# EAGLE board circuit (EAGLE 9.7.0)

Size 156.44 x 90.49 mm. Coordinates in mm from the lower left corner, seen from the top.
Outline: 0,0 156.44,0 156.44,90.49 0,90.49 0,0
Copper layers (1*16): Top 0.035mm / dielectric 1.5mm / Bottom 0.035mm
Design rules "default": minimum track width 6mil, minimum drill 0.35mm, track to track 6mil, track to pad 6mil, pad to pad 6mil, via to via 6mil, smd to smd 6mil, copper to edge 40mil, drill to drill 6mil, minimum pad ring 10mil, minimum via ring 8mil, stop-mask expansion 4mil, vias tented up to drill 0mil, thermal gap 10mil

## Footprints (pad centres in the part's own frame; a part is rotated, then mirrored left to right if it is on the bottom)
DIODE-AXIAL = drill 1: 1 -5.08,0; 2 5.08,0
LEDRD254W60D565H860B = drill 0.981 pad 1.581: 1 -1.27,0; 2 1.27,0
LEDRD254W60D565H860B_G = drill 0.981 pad 1.581: 1 -1.27,0; 2 1.27,0
LU-5-R = drill 0.8: 1 -6.35,-3.81; 5 3.81,-3.81; 6 6.35,-3.81; 7 6.35,3.81; 8 3.81,3.81; 12 -6.35,3.81
MOTOR = drill 1.118 pad 3.15 octagon: + 2.54,0; - -2.54,0
BATTERY-GENERIC = drill 1.118 pad 3.15 octagon: + 2.54,0; - -2.54,0
RESAD1016W63L850D250B = drill 0.83 pad 1.43: 1 -5.08,0; 2 5.08,0
TO92 = drill 0.813 octagon: 1 -1.27,0; 2 0,1.905; 3 1.27,0
ARDUINO-UNO-R3-SHIELD = drill 1.016 pad 1.88: 3.3V 24.13,-2.54; 5V 24.13,0; A0 24.13,12.7; A1 24.13,15.24; A2 24.13,17.78; A3 24.13,20.32; A4 24.13,22.86; A5 24.13,25.4; AREF -24.13,-13.97; D2 -24.13,20.32; D3 -24.13,17.78; D4 -24.13,15.24; D5 -24.13,12.7; D6 -24.13,10.16; D7 -24.13,7.62; D8 -24.13,3.81; D9 -24.13,1.27; D10 -24.13,-1.27; D11 -24.13,-3.81; D12 -24.13,-6.35; D13 -24.13,-8.89; GND@0 24.13,2.54; GND@1 24.13,5.08; GND@2 -24.13,-11.43; IOREF 24.13,-7.62; NC 24.13,-10.16; RES 24.13,-5.08; RX -24.13,25.4; SCL -24.13,-19.05; SDA -24.13,-16.51; TX -24.13,22.86; VIN 24.13,7.62

## Placement (x,y rotation side)
D1  DIODEDIODE-AXIAL  [DIODE-AXIAL]  109.43,34.68 0 top
D2  RED  [LEDRD254W60D565H860B]  87.84,19.44 180 top
D3  GREEN  [LEDRD254W60D565H860B_G]  110.7,19.44 180 top
K2  RELAY-SPDT_LU-5-R  [LU-5-R]  114.44,62.63 90 top
M2  MOTOR_HDR  [MOTOR]  102.33,82.23 0 top
P2  BATTERYGENERIC  [BATTERY-GENERIC]  148.18,68.86 180 top
R1  1k  [RESAD1016W63L850D250B]  89.11,32.14 180 top
R2  220  [RESAD1016W63L850D250B]  84.03,16.9 0 top
R3  220  [RESAD1016W63L850D250B]  106.89,16.9 0 top
T1  NPN  [TO92]  94.19,39.76 0 top
U1  ARDUINO-UNO-R3-SHIELD  [ARDUINO-UNO-R3-SHIELD]  29.84,34.52 180 top

## Library data of the parts
D1 K2 M2 P2 R1-R3 U1 = Tinkercad
D2 = Tinkercad; CATEGORY: Opto-Electronic; SUB-CATEGORY: LED; VALUE: LED_RED
D3 = Tinkercad; CATEGORY: Opto-Electronic; SUB-CATEGORY: LED; VALUE: LED_GREEN
T1 = Tinkercad; CATEGORY: Transistor; SUB-CATEGORY: BJT; TYPE: NPN

## Nets
D2_A: D2.1 R2.2
D3_A: D3.1 R3.2
M2_+: K2.6 M2.+
P2+: D1.2 K2.1 K2.5 P2.+ U1.5V
P2-: D2.2 D3.2 M2.- P2.- T1.1 U1.GND@0 U1.GND@1 U1.GND@2
T1_B: R1.1 T1.2
T1_E: D1.1 K2.8 T1.3
U1_D10: R1.2 U1.D10
U1_D11: R2.1 U1.D11
U1_D13: R3.1 U1.D13

## Tracks (layer width: path | path; a pad name or v marks a point on that pad's centre or on a via)
D2_A  (1 unrouted)
D3_A  (1 unrouted)
M2_+  (1 unrouted)
P2+  (4 unrouted)
P2-  (7 unrouted)
T1_B  (1 unrouted)
T1_E  (2 unrouted)
U1_D10  (1 unrouted)
U1_D11  (1 unrouted)
U1_D13  (1 unrouted)